# Altium PCB PCB1.PcbDoc (part 4 of 4)
Units mm, origin at the board's own origin, x right, y up, seen from the top; angles counter-clockwise.
Board outline 27.87 x 27.34 mm, 4 copper layers (Top Layer, Mid-Layer 1, Mid-Layer 2, Bottom Layer); 8 components, 11 nets, 32 pads, 618 vias.
Unrouted connection lines stored in the file: 1.
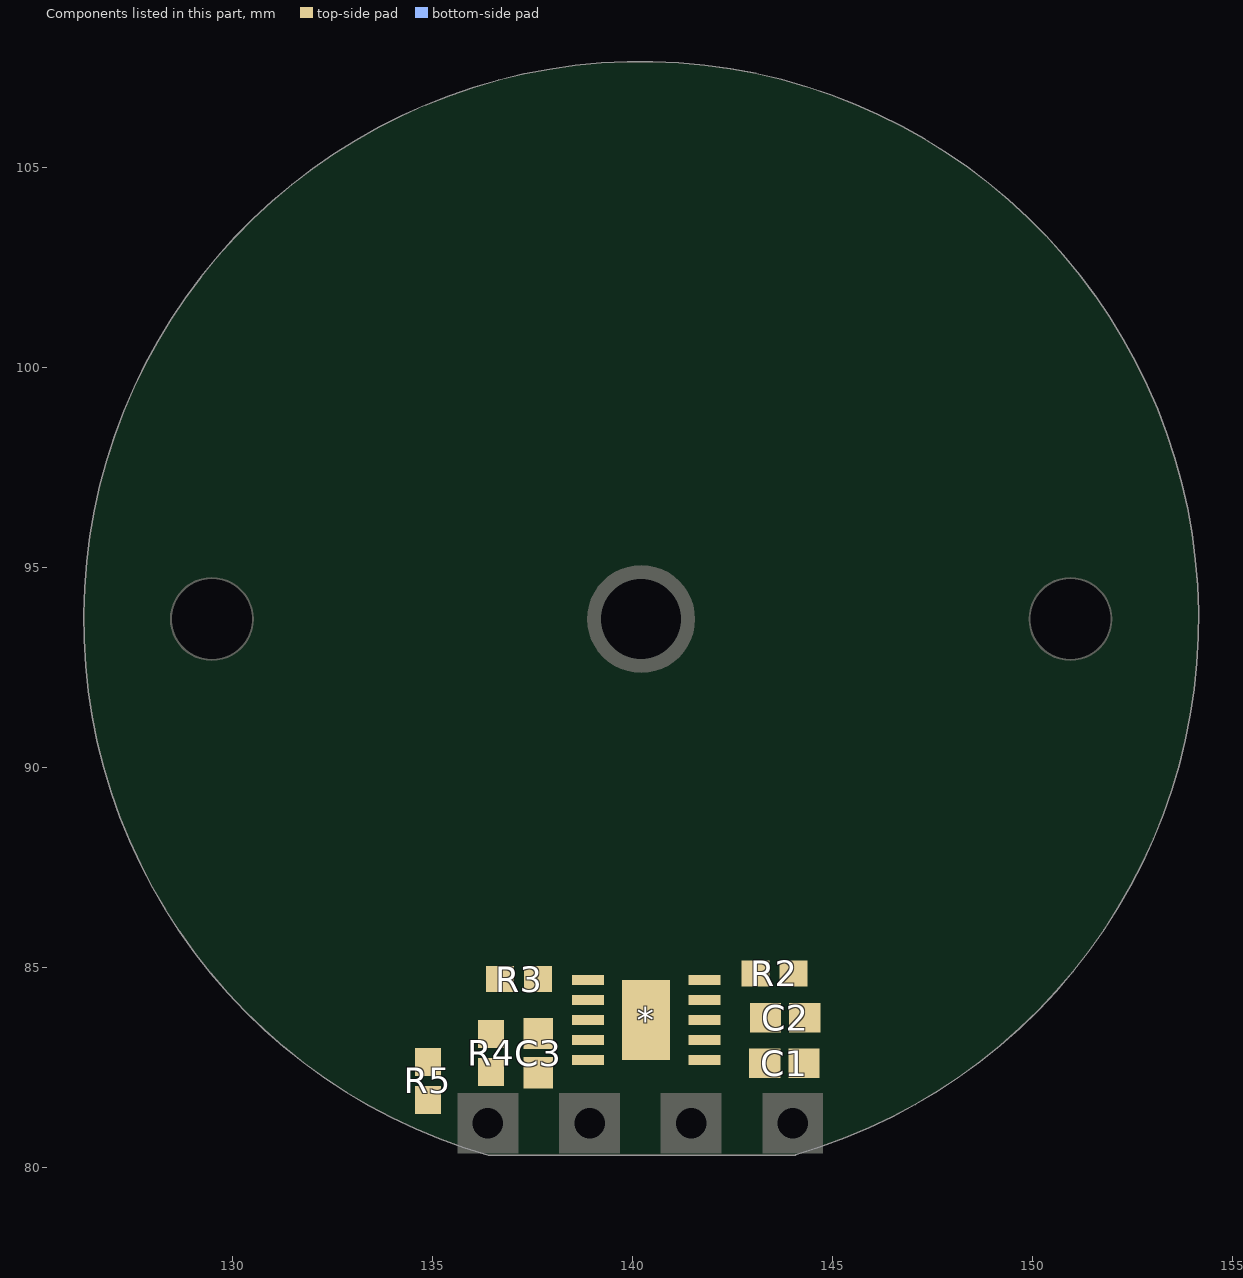
[diagram p6: the components of this part, seen from the top]

## Polygon pours and split planes (outlines as drawn) (continued)
no net on Bottom Solder "NONET_L-01_P-001" (solid): 143.73,87.1 146.873,81.473 ccw(c140.59,93.452) 154.03,91.927 147.676,92.749 cw(c140.418,93.615)
no net on Bottom Solder "NONET_L-01_P-001" (solid): 147.673,94.698 154.026,95.536 ccw(c140.182,93.699) 148.667,104.791 144.778,99.698 cw(c140.402,93.826)
no net on Bottom Solder "NONET_L-01_P-001" (solid): 135.623,99.687 131.721,104.77 ccw(c140.235,93.699) 126.386,95.501 132.74,94.679 cw(c140.014,93.826)
no net on Bottom Solder "NONET_L-01_P-001" (solid): 143.088,100.671 145.539,106.592 ccw(c140.208,93.683) 134.844,106.578 137.31,100.664 cw(c140.208,93.938)
no net on Top Solder "NONET_L-01_P-001" (solid): 143.73,87.1 146.873,81.473 ccw(c140.59,93.452) 154.03,91.927 147.676,92.749 cw(c140.418,93.615)
no net on Top Solder "NONET_L-01_P-001" (solid): 132.743,92.73 126.39,91.892 ccw(c140.347,93.809) 133.487,81.504 136.597,87.086 cw(c140.337,93.779)
no net on Top Layer "NONET_L-01_P-001" (solid, pour order 4): 154.178,93.599 154.178,93.682 ccw(c140.164,93.682) 140.164,107.696 139.7,107.696 ccw(c139.7,94.234) 126.238,94.234 126.238,93.853 ccw(c140.335,93.853) 140.335,79.756 ccw(c140.335,93.599)
no net on Mid-Layer 1 "NONET_L-01_P-001" (solid, pour order 5): 154.178,92.964 154.178,94.488 ccw(c140.97,94.488) 140.97,107.696 139.573,107.696 ccw(c139.573,94.361) 126.238,94.361 126.238,93.218 ccw(c139.7,93.218) 139.7,79.756 140.97,79.756 ccw(c140.97,92.964)
no net on Bottom Layer "NONET_L-01_P-001" (solid, pour order 7): 154.178,93.345 154.178,94.107 ccw(c140.589,94.107) 140.589,107.696 139.954,107.696 ccw(c139.954,93.98) 126.238,93.98 126.238,93.218 ccw(c139.7,93.218) 139.7,79.756 140.335,79.756 140.589,79.756 ccw(c140.589,93.345)
no net on Mid-Layer 2 "NONET_L-01_P-001" (solid, pour order 6): 154.178,93.599 154.178,93.682 ccw(c140.037,93.682) 140.037,107.823 ccw(c140.037,94.024) 126.238,94.024 126.238,93.747 ccw(c140.229,93.747) 140.229,79.756 140.335,79.756 ccw(c140.335,93.599)

## Keep-outs
Keep-Out Layer:
  the board outline again, w0.1

## Other copper
Top Layer:
  pour cut-out: 136.906,84.328 136.906,78.867 144.955,78.867 144.955,84.32 137.185,84.32
Mid-Layer 1:
  pour cut-out: 136.089,82.179 136.017,82.179 136.017,78.74 144.653,78.74 144.653,82.296
Mid-Layer 2:
  pour cut-out: 135.763,80.264 135.89,80.391 144.526,80.391 144.526,79.248 135.763,79.248
Bottom Layer:
  pour cut-out: 136.017,80.137 144.272,80.137 144.526,80.391 144.526,79.375 136.017,79.375

## Silkscreen, mask and mechanical layers (free items; w line width, h text height)
Top Overlay:
  drawing of 8 lines, arcs and shapes, not listed
  text "v5" at 141.997,88.973 h1.3
  text "PCBMotor" at 137.642,87.296 h1.2
Bottom Overlay:
  lines w0.35: 137.284,86.268 ccw(c140.208,93.714) 143.219,86.302 cw(c140.208,93.714) 137.284,86.268
  text "F/R" at 135.612,81.973 h1.6 r270
  text "SIG" at 138.152,81.973 h1.6 r270
  text "GND" at 140.692,81.973 h1.6 r270
  text "VCC" at 143.232,81.973 h1.6 r270
Top Solder:
  lines w6.4: 129.842,90.937 cw(c140.208,93.714) 149.934,89.179
Bottom Solder:
  lines w6.4: 129.842,90.937 cw(c140.208,93.714) 149.934,89.179
Mechanical 1:
  lines w0.254: 144.059,80.308 136.395,80.308 cw(c140.208,93.714) 144.075,80.324 ; 144.441,80.419 144.464,80.442